# Altium PCB STL.PcbDoc
Units mm, origin at the board's own origin, x right, y up, seen from the top; angles counter-clockwise.
Board outline 100 x 80 mm, 2 copper layers (Top Layer, Bottom Layer); 52 components, 57 nets, 196 pads, 7 vias.
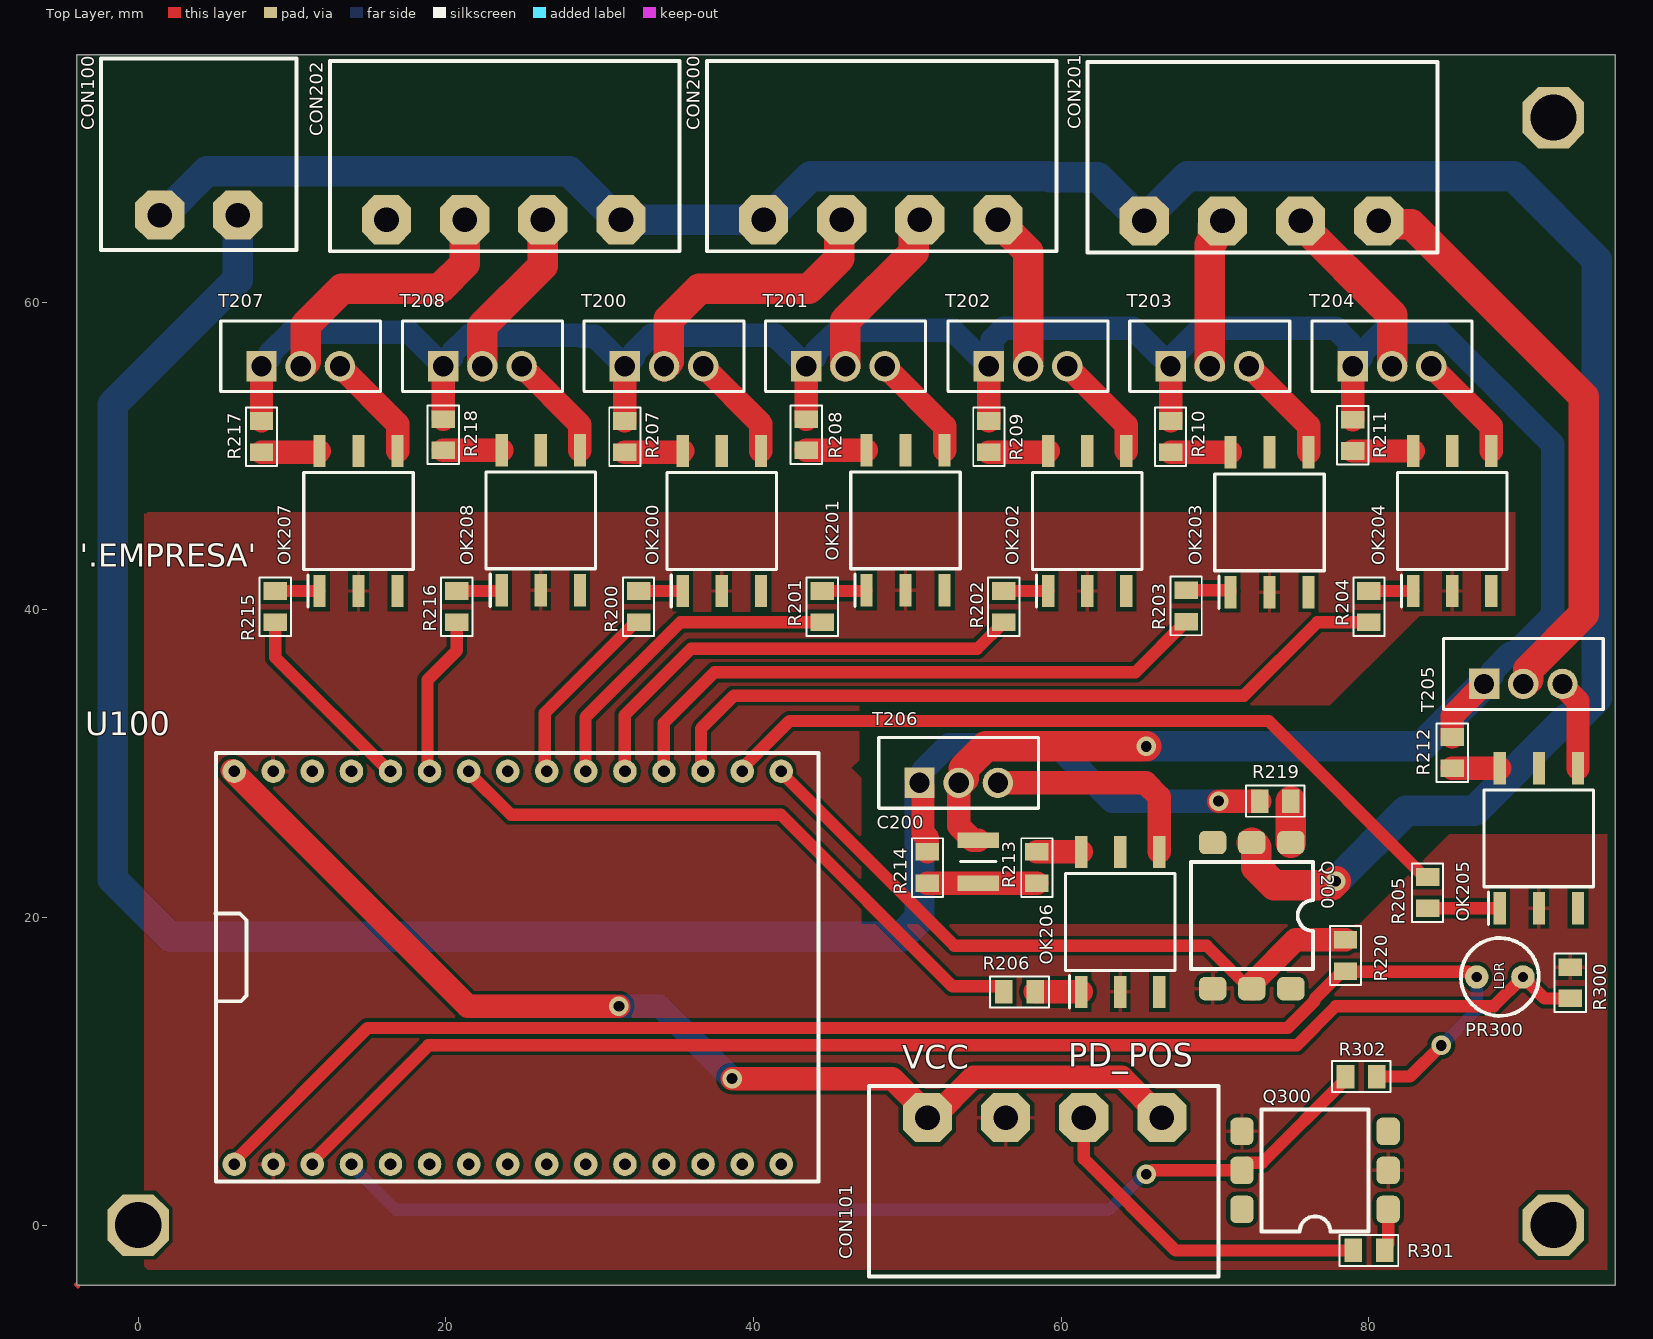
[diagram p0: Top Layer view]
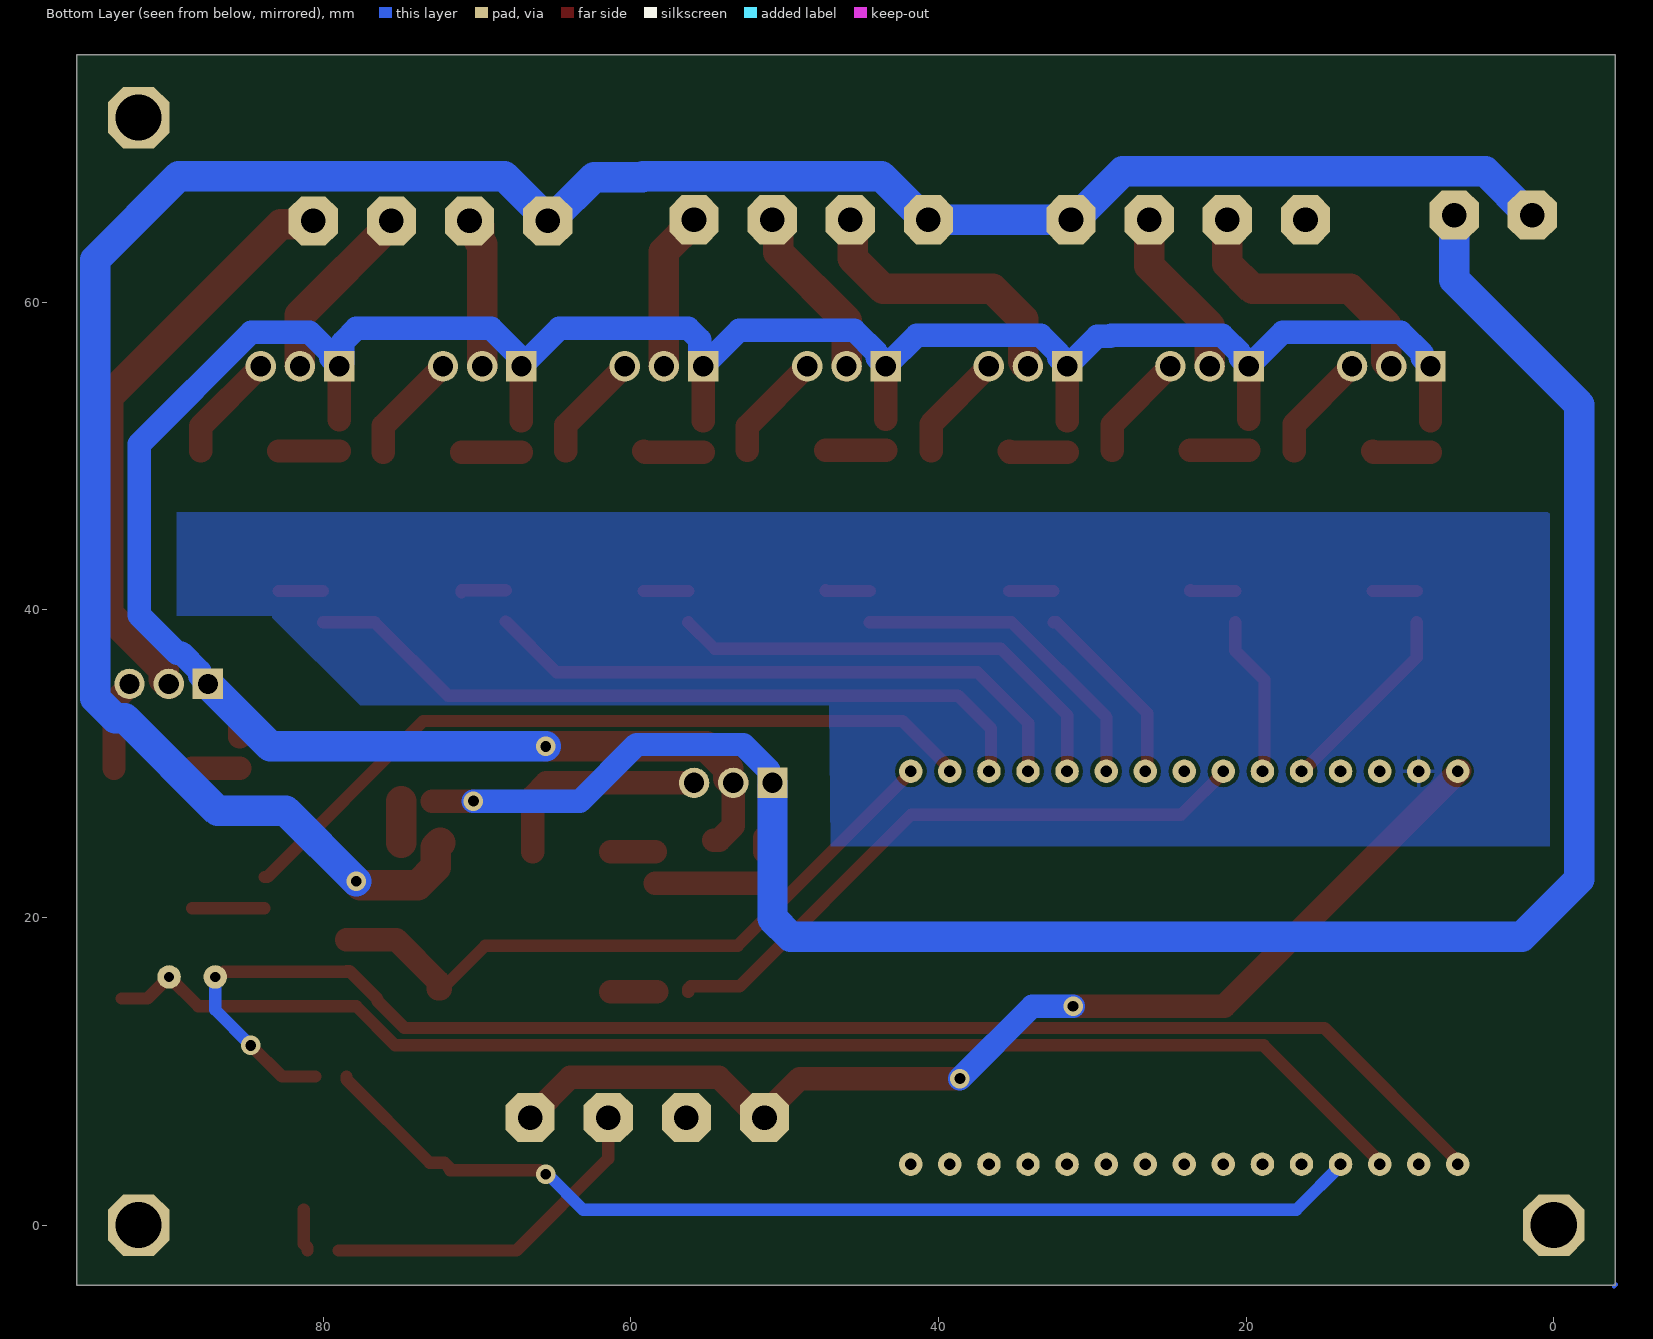
[diagram p1: Bottom Layer view, seen from below]
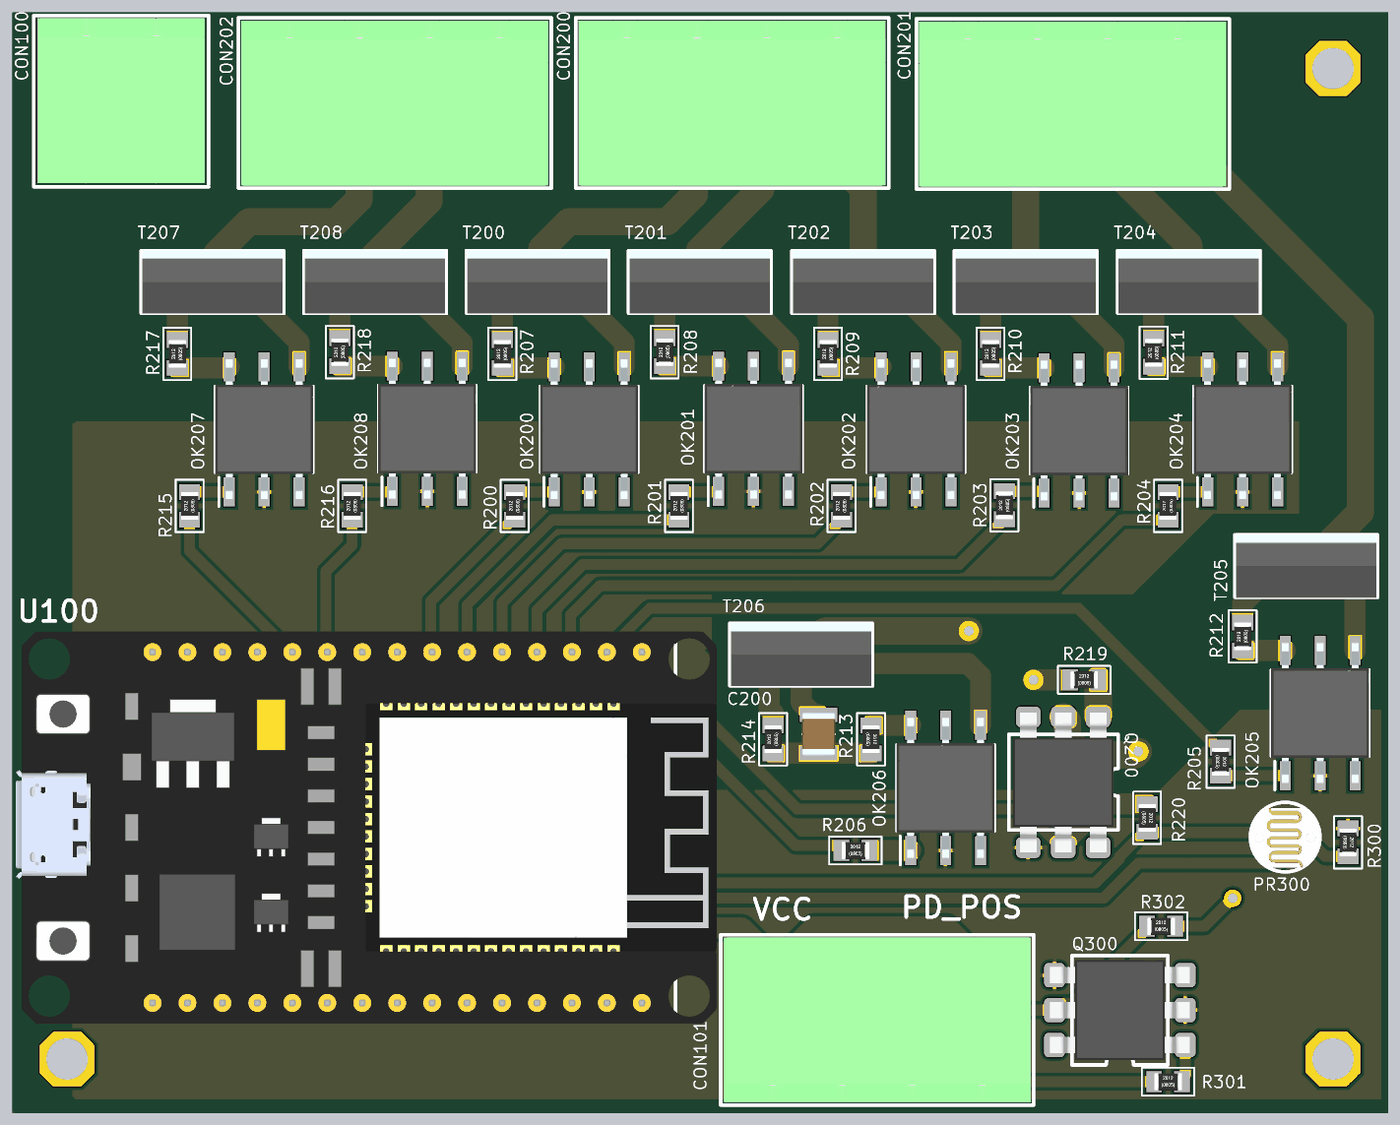
[diagram p2: 3D render of the assembled board from above, using the file's embedded part models]

## Layer stack, top to bottom
Top Solder: solder mask 0.0102, Solder Resist, Dk 3.5
Top Layer: signal copper 0.0356
Dielectric 1: dielectric 0.32, FR-4, Dk 4.8
Bottom Layer: signal copper 0.0356
Bottom Solder: solder mask 0.0102, Solder Resist, Dk 3.5

## Board outline
-3.988,-3.927 -3.988,76.073 96.012,76.073 96.012,-3.927

## Design rules (kind name [scope] priority, off if disabled: settings)
Clearance [All] p1: gap=0.254 ignorepadtopadclearanceinfootprint=FALSE except(0: Arc-Hole Track-Hole SMDPad-Hole THPad-Hole Via-Hole Fill-Hole Poly-Hole Region-Hole Text-Hole)
HoleSize [All] p1: absolutevalues=TRUE maxlimit=4 minlimit=0.025 maxpercent=80.000 minpercent=20.000
HoleToHoleClearance [All] p1: gap=0.1 allowstackedmicrovias=TRUE
PolygonConnect [All] p1: connectstyle=Relief reliefconductorwidth=0.254 reliefentries=4 polygonreliefangle="90 Angle" airgapwidth=0.254
RoutingCorners RoutingCornersAC [InNetClass('ACNET')] p1: cornerstyle=Round minsetback=2.54 maxsetback=2.54
RoutingCorners [All] p2: cornerstyle=45-Degree minsetback=2.54 maxsetback=2.54
RoutingVias [All] p1: holewidth=0.711 width=1.27 viastyle="Through Hole" minholewidth=0.711 minwidth=1.27 maxholewidth=0.711 maxwidth=1.27
SilkToSilkClearance [All] p1: silktosilkclearance=0.127
SilkToSolderMaskClearance [IsPad] p1: minsilkscreentomaskgap=0.127 clearancetoexposedcopper=TRUE
SolderMaskExpansion [All] p1: expansion=0.102 istentingtop=FALSE
Width Width_1 [All] p1: maxlimit=1.98 minlimit=0.8 preferedwidth=1.524
Width Width_AC [InNetClass('ACNET')] p2: maxlimit=3.2 minlimit=0.635 preferedwidth=1.9
25 further rules are at their usual default settings.

## Classes and differential pairs
component class U_Sensors: PR300 Q300 R300 R301 R302
net class ACNET: AC_F AC_N AC_OUT AM1 AM2 VD1 VD2 VDPED VM1 VM2 VMPED
component class U_Control: C200 CON200 CON201 CON202 OK200 OK201 OK202 OK203 OK204 OK205 OK206 OK207 OK208 Q200 R200 R201 R202 R203 R204 R205 R206 R207 R208 R209 R210 R211 R212 R213 R214 R215 R216 R217 R218 R219 R220 T200 T201 T202 T203 T204 T205 T206 T207 T208
component class Processamento: CON100 CON101 U100

## Components (designator, comment, footprint, x,y, rotation, side; value= is the part's Value field where it differs from the comment)
C200 "100nF 500V" CAPC3225-1210N 54.61,23.622 r270 top
CON100 "TERM BLOCK 2POS" "MSTBA 2G" 6.528,65.557 r180 top
CON101 "TERM BLOCK 4POS" "MSTBA 4G" 51.308,6.985 r0 top
CON200 "TERM BLOCK 4POS" "MSTBA 4G" 55.892,65.351 r180 top
CON201 "TERM BLOCK 4POS" "MSTBA 4G" 80.645,65.278 r180 top
CON202 "TERM BLOCK 4POS" "MSTBA 4G" 31.381,65.351 r180 top
OK200 "MOC3021SM" SOP254P1016X450-6N 37.943,45.772 r90 top
OK201 "MOC3021SM" SOP254P1016X450-6N 49.881,45.815 r90 top
OK202 "MOC3021SM" SOP254P1016X450-6N 61.692,45.772 r90 top
OK203 "MOC3021SM" SOP254P1016X450-6N 73.543,45.689 r90 top
OK204 "MOC3021SM" SOP254P1016X450-6N 85.429,45.772 r90 top
OK205 "MOC3021SM" SOP254P1016X450-6N 91.059,25.146 r90 top
OK206 "MOC3021SM" SOP254P1016X450-6N 63.839,19.707 r90 top
OK207 "MOC3021SM" SOP254P1016X450-6N 14.321,45.772 r90 top
OK208 "MOC3021SM" SOP254P1016X450-6N 26.174,45.815 r90 top
PR300 "LDR" "LDR 3x0.5" 88.519,16.129 r90 top
Q200 "4N25" 6-SMD 74.93,24.867 r270 top
Q300 "4N25" 6-SMD 81.255,1.016 r180 top
R200 "1K" CR2012-0805 32.524,40.205 r90 top
R201 "1K" CR2012-0805 44.462,40.205 r90 top
R202 "1K" CR2012-0805 56.273,40.205 r90 top
R203 "1K" CR2012-0805 68.124,40.249 r90 top
R204 "1K" CR2012-0805 80.01,40.205 r90 top
R205 "1K" CR2012-0805 83.82,21.612 r270 top
R206 "1K" CR2012-0805 57.289,15.157 r0 top
R207 "180R" CR2012-0805 31.635,51.254 r90 top
R208 "180R" CR2012-0805 43.426,51.381 r90 top
R209 "180R" CR2012-0805 55.3,51.254 r90 top
R210 "180R" CR2012-0805 67.111,51.254 r90 top
R211 "180R" CR2012-0805 78.962,51.338 r90 top
R212 "180R" CR2012-0805 85.429,30.712 r90 top
R213 "180R" CR2012-0805 58.42,23.241 r270 top
R214 "2K2" CR2012-0805 51.308,23.241 r90 top
R215 "1K" CR2012-0805 8.902,40.205 r90 top
R216 "1K" CR2012-0805 20.713,40.205 r90 top
R217 "180R" CR2012-0805 8.013,51.254 r90 top
R218 "180R" CR2012-0805 19.824,51.381 r90 top
R219 "33K" CR2012-0805 73.914,27.559 r0 top
R220 "10K" CR2012-0805 78.486,17.526 r270 top
R300 "220R" CR2012-0805 93.091,15.748 r270 top
R301 "1K" CR2012-0805 80.01,-1.651 r0 top
R302 "2K2" CR2012-0805 79.502,9.652 r0 top
T200 "BTA12-600BRG" TO255P460X1020X2005-3P 31.635,55.826 r0 top
T201 "BTA12-600BRG" TO255P460X1020X2005-3P 43.427,55.826 r0 top
T202 "BTA12-600BRG" TO255P460X1020X2005-3P 55.3,55.826 r0 top
T203 "BTA12-600BRG" TO255P460X1020X2005-3P 67.111,55.826 r0 top
T204 "BTA12-600BRG" TO255P460X1020X2005-3P 78.962,55.826 r0 top
T205 "BTA12-600BRG" TO255P460X1020X2005-3P 87.493,35.179 r0 top
T206 "BTA12-600BRG" TO255P460X1020X2005-3P 50.79,28.745 r0 top
T207 "BTA12-600BRG" TO255P460X1020X2005-3P 8.013,55.826 r0 top
T208 "BTA12-600BRG" TO255P460X1020X2005-3P 19.824,55.826 r0 top
U100 "MÓDULO ESP32" "ESP32 MOD" 6.24,29.5 r0 top

## Footprints (in the part's own frame and the unit in brackets; to place one, negate y for a bottom-side part, rotate by r counter-clockwise, add the part's x,y. Pads: shape width x height; smd on the part's side, far side on the other; paste and mask are expansions set on the pad)
6-SMD [mm]
  rrect50% 1.52x1.78 smd: 1(0,0) 2(0,-2.54) 3(0,-5.08) 4(9.5,-5.08) 5(9.5,-2.54) 6(9.5,0)
  silkscreen extent 1.27,-6.5 8.23,1.45, body extent -0.33,-6.18 9.83,1.1, height 3.61
CAPC3225-1210N [mm]
  rect 1.02x2.72 smd: 1(-1.4,0) 2(1.4,0)
  silkscreen extent 0,-1.15 0,1.15, body extent -1.6,-1.25 1.6,1.25, height 2.1
CR2012-0805 [mil] "Chip Capacitor"
  rect 45x60 smd: 1(-40,0) 2(40,0)
  silkscreen extent -75,-40 75,40, body extent -39,-25 39,25, height 18
"ESP32 MOD" [mil]
  round 60 hole 30: 1(0,-1005.51) 2(100,-1005.51) 3(100,0) 4(0,0) 5(1300,0) 8(1200,0) 9(1400,0) 10(1100,0) 11(1000,0) 12(900,0) 13(800,0) 14(700,0) 15(600,0) 16(500,0) 17(400,0) 18(300,0) 20(200,0) 21(200,-1005.51) 22(300,-1005.51) 24(400,-1005.51) 25(500,-1005.51) 27(600,-1005.51) 34(700,-1005.51) 35(800,-1005.51) 36(1400,-1005.51) 38(900,-1005.51) 39(1300,-1005.51) 40(1100,-1005.51) 41(1200,-1005.51) 42(1000,-1005.51)
  silkscreen extent -48,-1050 1495,47, body extent -392,-1060 1613,62, height 339
"LDR 3x0.5" [mm]
  round 1.524 hole 0.66: 1(0,-1.5) 2(0,1.5)
  silkscreen extent -2.53,-2.53 2.53,2.53, body extent -2.2,-2.55 2.1,2.55, height 9.1
"MSTBA 2G" [mil]
  oct 126x126 hole 63: 1(2,-4) 2(202,-4)
  silkscreen extent -148,-405 352,85, body extent -137,-398 341,75, height 339
"MSTBA 4G" [mil]
  oct 126x126 hole 63: 1(0,0) 2(200,0) 3(400,0) 4(600,0)
  silkscreen extent -150,-407 745,81, body extent -141,-399 738,73, height 339
SOP254P1016X450-6N [mm]
  rect 2.1x0.8 smd: 1(-4.55,2.54) 2(-4.55,0) 3(-4.55,-2.54) 4(4.55,-2.54) 5(4.55,0) 6(4.55,2.54)
  silkscreen extent -5.6,-3.56 3.15,3.56, body extent -5.08,-3.56 5.08,3.56, height 4.5
TO255P460X1020X2005-3P [mm]
  rect 1.98x1.98 hole 1.32: 1(0,0)
  round 1.98 hole 1.32: 2(2.55,0) 3(5.1,0)
  silkscreen extent -2.65,-1.65 7.75,2.95, body extent -2.55,-1.65 7.65,2.95, height 19.3

## Part data
C200: library part "CAP 100nF 500V C1210C106M6PACTU 1210", "CAP CER 0.1UF 500V X7R 1210", Arrow Part Number=C1210C106M6PACTU, Capacitance=100nF, Case Code (Imperial)=1210, Case Code (Metric)=3225, Dielectric=X7R, Dielectric Material=Ceramic, Manufacturer=KEMET, Manufacturer Part Number=C1210C104KCRACTU, Manufacturer_Name=Kemet, Max Operating Temperature=125°C, Min Operating Temperature=-55°C, Mouser Part Number=80-C1210C106M6P, Package Quantity=1, Supplier Part Number 1=C141218, Tolerance=10%, Voltage Rating=500V, Voltage Rating (DC)=1kV, Arrow Price/Stock=https://www.arrow.com/en/products/c1210c106m6pactu/kemet-corporation, Case/Package=1210, Category="Ceramic Capacitors", ComponentLink1Description=https://datasheet.ciiva.com/5409/kem-c1010-x7r-hv-smd-5409158.pdf?src-supplier=Mouser, ComponentLink1URL=https://datasheet.ciiva.com/5409/kem-c1010-x7r-hv-smd-5409158.pdf?src-supplier=Mouser, Contact Plating=Tin,Matte, Datasheet Link=https://api.kemet.com/component-edge/download/datasheet/C1210C106M6PACTU.pdf, Depth=2.5mm, Height=2.1mm, Length=3.2mm, Manufacturer_Part_Number=C1210C106M6PACTU, Mount="Surface Mount", Mouser Price/Stock=https://www.mouser.co.uk/ProductDetail/KEMET/C1210C106M6PACTU?qs=K%2Fj%2Fqf%252B0fqKxjJfAWxNdjg%3D%3D, Packaging="Tape and Reel", Pricing 1="1=0,22980, 10=0,17550, 30=0,16550, 100=0,15550, 500=0,15110, 1000=0,14890, 1=0,22120, 10=0,16900, 30=0,15930, 100=0,14970, 500=0,14540, 1000=0,14330, 1=1,15440, 10=0,88170, 30=0,83110, 100=0,78120, 500=0,75890, 1000=0,74770, 1=1,10970, 10=0,84760, 30=0,79900, 100=0,75100, 500=0,72950, 1000=0,71880, 1=0,14920, 10=0,11400, 30=0,10740, 100=0,10100, 500=0,09810, 1000=0,09670, 1=0,12760, 10=0,09740, 30=0,09180, 100=0,08630, 500=0,08390, 1000=0,08260, 1=1,36580, 10=1,04320, 30=0,98340, 100=0,92430, 500=0,89790, 1000=0,88460, 1=19,30340, 10=14,74390, 30=13,89800, 100=13,06300, 500=12,68950, 1000=12,50270, 1=0,72810, 10=0,55610, 30=0,52420, 100=0,49270, 500=0,47860, 1000=0,47160, 1=13,29180, 10=10,15230, 30=9,56980, 100=8,99480, 500=8,73760, 1000=8,60900, 1=1,52590, 10=1,16550, 30=1,09860, 100=1,03260, 500=1,00310, 1000=0,98830, 1=0,23690, 10=0,18090, 30=0,17050, 100=0,16030, 500=0,15570, 1000=0,15340, 1=0,17570, 10=0,13420, 30=0,12650, 100=0,11890, 500=0,11550, 1000=0,11380 (AUD)", REACH SVHC="No SVHC", RoHS=Yes, RoHS Compliant=Yes, Series=C, Stock 1=12082, Supplier 1=LCSC, Termination=SMD/SMT, Thickness=0.091inch, Width=2.5mm
CON100: library part "TERM BLOCK HEADER 2POS R/A 5.08MM", "TERM BLOCK HDR 2POS R/A 5.08MM", Color=Green, Current - IEC=12A, Current - UL=15A, Manufacturer="Phoenix Contact", Manufacturer Part Number=1757242, Operating Temperature=-, Supplier Part Number 1=277-1106-ND, Voltage - IEC=400V, Voltage - UL=300V, Category="Connectors, Interconnects", ComponentLink1Description=http://media.digikey.com/pdf/Data%20Sheets/Phoenix%20Contact%20PDFs/1757242.pdf, ComponentLink1URL=http://media.digikey.com/pdf/Data%20Sheets/Phoenix%20Contact%20PDFs/1757242.pdf, Contact Mating Finish=Tin, Features=-, Header Orientation="90°, Right Angle", Mounting Type="Through Hole", Number of Levels=1, Number of Positions=2, Packaging=Bulk, Part Status=Active, Pitch="0.200\" (5.08mm)", Plug Wire Entry=-, Positions Per Level=2, Pricing 1="1=0.59, 10=0.563, 50=0.5386, 100=0.5239, 250=0.4896, 500=0.45044, 1000=0.408, 2500=0.3888, 5000=0.3648 (USD)", RoHS="RoHS Compliant", Stock 1=14081, Supplier 1=Digi-Key, Supplier 2=LCSC, Supplier Part Number 2=C505824, Termination Style=Solder, Type="Header, Male Pins, Shrouded (4 Side)", Wire Gauge or Range - AWG=-, Wire Gauge or Range - mm²=-
CON101 CON200 CON201 CON202: library part "TERM BLOCK HEADER 4POS R/A 5.08MM", "TERM BLOCK HDR 4POS R/A 5.08MM", ComponentLink1Description=http://media.digikey.com/pdf/Data%20Sheets/Phoenix%20Contact%20PDFs/1757242.pdf, ComponentLink1URL=http://media.digikey.com/pdf/Data%20Sheets/Phoenix%20Contact%20PDFs/1757242.pdf
OK200 OK201 OK202 OK203 OK204 OK205 OK206 OK207 OK208: library part "OPTOISO Triac MOC3021SM SOP6N", "OPTOCOUPLERS SMD-6 ROHS", Manufacturer="Orient Technology", Manufacturer Part Number=OR-MOC3021S, Manufacturer_Name=Isocom, Supplier Part Number 1=C370899, Arrow Part Number=MOC3021SM, Arrow Price/Stock=https://www.arrow.com/en/products/moc3021sm/isocom, Datasheet Link=https://datasheet.datasheetarchive.com/originals/distributors/Datasheets-313/192003.pdf, Height=4.5mm, Manufacturer_Part_Number=MOC3021SM, Supplier 1=LCSC
PR300: library part "LDR GL5506(4-7K) SMD", "THROUGH HOLE PHOTORESISTORS ROHS", Manufacturer="JCHL(Shenzhen Jing Chuang He Li Tech)", Manufacturer Part Number=GL5506(4-7K), Supplier Part Number 1=C404970, Supplier 1=LCSC
Q200 Q300: library part "OPTOISO 4N25S 2.5KV TRANS W/BASE 6SMD", "OPTOISO 4.17KV TRANS W/BASE 6SMD", Case/Package=SMD/SMT, Manufacturer="ON Semiconductor", Manufacturer Part Number=4N25SR2M, Max Power Dissipation=250mW, Package Quantity=1000, Supplier Part Number 1=4N25SR2MCT-ND, Category=Optocouplers, ComponentLink1Description=http://www.farnell.com/datasheets/2287881.pdf?src-supplier=Farnell, ComponentLink1URL=http://www.farnell.com/datasheets/2287881.pdf?src-supplier=Farnell, ComponentLink2Description=https://produktinfo.conrad.com/datenblaetter/1200000-1299999/001265459-da-01-en-OPTOISOLATOR_TRANS_7__4N25SR2M_SMD_6_ONS.PDF?src-supplier=Conrad, ComponentLink2URL=https://produktinfo.conrad.com/datenblaetter/1200000-1299999/001265459-da-01-en-OPTOISOLATOR_TRANS_7__4N25SR2M_SMD_6_ONS.PDF?src-supplier=Conrad, ComponentLink3Description=http://www.onsemi.com/pub/Collateral/4N37M-D.pdf?src-supplier=Digi-Key, ComponentLink3URL=http://www.onsemi.com/pub/Collateral/4N37M-D.pdf?src-supplier=Digi-Key, ComponentLink4Description=http://www.farnell.com/datasheets/2287881.pdf?src-supplier=Newark, ComponentLink4URL=http://www.farnell.com/datasheets/2287881.pdf?src-supplier=Newark, ComponentLink5Description=https://www.fairchildsemi.com/datasheets/4N/4N25M.pdf?src-supplier=Digi-Key, ComponentLink5URL=https://www.fairchildsemi.com/datasheets/4N/4N25M.pdf?src-supplier=Digi-Key, Lead Free="Lead Free", Power Dissipation=250mW, Pricing 1="1=0,73000, 10=0,57000, 100=0,36570, 500=0,31448 (USD)", RoHS=No, Stock 1=12901, Supplier 1=Digi-Key, Supplier 2=LCSC, Supplier Part Number 2=C143074
R200 R201 R202 R203 R204 R205 R206 R215 R216 R301: library part "RES 1K OHM 1% 1/8W 0805 SMD", "RES SMD 1K OHM 1% 1/8W 0805", Case Code (Imperial)=0805, Case Code (Metric)=2012, Manufacturer=Yageo, Manufacturer Part Number=RC0805FR-071KL, Max Operating Temperature=155°C, Max Power Dissipation=125mW, Min Operating Temperature=-55°C, Package Quantity=1, Resistance=1kR, Supplier Part Number 1=311-1.00KCRDKR-ND, Temperature Coefficient=100ppm/°C, Tolerance=1%, Voltage Rating=150V, Case/Package=0805, Category="Chip SMD Resistors", ComponentLink1Description=http://media.digikey.com/pdf/Data%20Sheets/Rohm%20PDFs/MCR10%20(new)%20series.pdf, ComponentLink1URL=http://media.digikey.com/pdf/Data%20Sheets/Rohm%20PDFs/MCR10%20(new)%20series.pdf, ComponentLink2Description=https://datasheet.ciiva.com/2456/pyu-r-int-thick-7-2456976.pdf?src-supplier=Digi-Key, ComponentLink2URL=https://datasheet.ciiva.com/2456/pyu-r-int-thick-7-2456976.pdf?src-supplier=Digi-Key, ComponentLink3Description=https://datasheet.ciiva.com/2456/pyu-r-int-thick-7-2456977.pdf?src-supplier=Digi-Key, ComponentLink3URL=https://datasheet.ciiva.com/2456/pyu-r-int-thick-7-2456977.pdf?src-supplier=Digi-Key, ComponentLink4Description=https://datasheet.ciiva.com/7941/1686128-7941719.pdf?src-supplier=Element14, ComponentLink4URL=https://datasheet.ciiva.com/7941/1686128-7941719.pdf?src-supplier=Element14, ComponentLink5Description=https://datasheet.ciiva.com/16850/rc0805-16850409.pdf?src-supplier=Future+Electronics, ComponentLink5URL=https://datasheet.ciiva.com/16850/rc0805-16850409.pdf?src-supplier=Future+Electronics, ComponentLink6Description=https://datasheet.ciiva.com/46385/444164-46385020.pdf?src-supplier=Element14, ComponentLink6URL=https://datasheet.ciiva.com/46385/444164-46385020.pdf?src-supplier=Element14, ComponentLink7Description=https://datasheet.ciiva.com/2456/pyu-r-int-thick-7-2456975.pdf?src-supplier=Digi-Key, ComponentLink7URL=https://datasheet.ciiva.com/2456/pyu-r-int-thick-7-2456975.pdf?src-supplier=Digi-Key, Composition="Thick Film", Depth=1.25mm, Features="Moisture Resistant", Height=0.024inch, Lead Free="Lead Free", Length=0.079inch, Military Standard=Not, Number of Pins=2, Number of Terminations=2, Packaging="Tape and Reel", Power Rating=125mW, Pricing 1="1=0,10000, 10=0,04000, 100=0,01630, 1000=0,00731, 2500=0,00635 (USD)", REACH SVHC=Unknown, RoHS=Yes, Stock 1=24108233, Supplier 1=Digi-Key, Supplier 2=LCSC, Supplier Part Number 2=C17513, Termination=SMD/SMT, Voltage Rating (DC)=150V, Width=0.049inch
R207 R208 R209 R210 R211 R212 R213 R217 R218: library part "RES 180R 1/8W 5% 0805 SMD", "RES 180 OHM 1/8W 5% 0805 SMD", Manufacturer=Uniroyal, Manufacturer Part Number=0805W8J0181T5E, Operating Temperature="-55°C ~ 155°C", Package / Case="0805 (2012 Metric)", Power (Watts)="0.125W, 1/8W", Resistance (Ohms)=180, Supplier Device Package=0805, Supplier Part Number 1=P180ACT-ND, Temperature Coefficient=±200ppm/°C, Tolerance=±5%, Category=Resistors, ComponentLink1Description=http://industrial.panasonic.com/www-cgi/jvcr13pz.cgi?E+PZ+3+AOA0001+ERJ6GEYJ181V+7+WW, ComponentLink1URL=http://industrial.panasonic.com/www-cgi/jvcr13pz.cgi?E+PZ+3+AOA0001+ERJ6GEYJ181V+7+WW, Composition="Thick Film", Failure Rate=-, Features="Automotive AEC-Q200", Height - Seated (Max)="0.028\" (0.70mm)", Packaging="Cut Tape (CT)", Part Status=Active, Pricing 1="1=0.1, 10=0.025, 25=0.018, 50=0.0136, 100=0.01, 250=0.00764, 500=0.00612, 1000=0.00451 (USD)", RoHS="RoHS Compliant", Size / Dimension="0.079\" L x 0.049\" W (2.00mm x 1.25mm)", Stock 1=114196, Supplier 1=Digi-Key, Supplier 2=LCSC, Supplier Part Number 2=C1339
R214 R302: library part "RES 2K2 OHM 1/8W 5% 0805 SMD", "RES SMD 2.2K OHM 5% 1/8W 0805", Manufacturer="Panasonic Electronic Components", Manufacturer Part Number=ERJ-6GEYJ222V, Operating Temperature="-55°C ~ 155°C", Package / Case="0805 (2012 Metric)", Power (Watts)="0.125W, 1/8W", Resistance (Ohms)=2.2k, Supplier Device Package=0805, Supplier Part Number 1=P2.2KACT-ND, Temperature Coefficient=±200ppm/°C, Tolerance=±5%, Category=Resistors, ComponentLink1Description=http://industrial.panasonic.com/www-cgi/jvcr13pz.cgi?E+PZ+3+AOA0001+ERJ6GEYJ222V+7+WW, ComponentLink1URL=http://industrial.panasonic.com/www-cgi/jvcr13pz.cgi?E+PZ+3+AOA0001+ERJ6GEYJ222V+7+WW, Composition="Thick Film", Datasheet=http://industrial.panasonic.com/www-cgi/jvcr13pz.cgi?E+PZ+3+AOA0001+ERJ6GEYJ222V+7+WW, eVendor=Digi-Key, eVendor#=P2.2KACT-ND, eVendorPrice=0,10, Failure Rate=-, Features="Automotive AEC-Q200", Height - Seated (Max)="0.028\" (0.70mm)", MOQ=2500, MSRP=0,00459, Number of Terminations=2, Obs=ERJ-6GEYJ222V, Packaging="Cut Tape (CT)", Part Status=Active, Part#=ERJ-6GEYJ222V, Pricing 1="1=0.1, 10=0.025, 25=0.018, 50=0.0136, 100=0.01, 250=0.00764, 500=0.00612, 1000=0.00451 (USD)", RoHS="RoHS Compliant", Size / Dimension="0.079\" L x 0.049\" W (2.00mm x 1.25mm)", Stock 1=100522, Supplier 1=Digi-Key, Supplier 2=LCSC, Supplier Part Number 2=C17520
R219: library part "RES 33K OHM 5% 1/8W 0805 SMD", "RES SMD 33K OHM 5% 1/8W 0805", Manufacturer=Uniroyal, Manufacturer Part Number=0805W8J0333T5E, Operating Temperature="-55°C ~ 155°C", Package / Case="0805 (2012 Metric)", Power (Watts)="0.125W, 1/8W", Resistance (Ohms)=33k, Supplier Device Package=0805, Supplier Part Number 1=RHM33KCPCT-ND, Temperature Coefficient=±200ppm/°C, Tolerance=±5%, Category=Resistors, ComponentLink1Description=http://rohmfs.rohm.com/en/products/databook/datasheet/passive/resistor/chip_resistor/mcr_g.pdf, ComponentLink1URL=http://rohmfs.rohm.com/en/products/databook/datasheet/passive/resistor/chip_resistor/mcr_g.pdf, Composition="Thick Film", Failure Rate=-, Features=-, Height - Seated (Max)="0.026\" (0.65mm)", Packaging="Cut Tape (CT)", Part Status=Active, Pricing 1="1=0.1, 10=0.015, 25=0.0112, 50=0.0084, 100=0.0063, 250=0.00476, 500=0.00382, 1000=0.00281 (USD)", RoHS="RoHS Compliant", Size / Dimension="0.079\" L x 0.049\" W (2.00mm x 1.25mm)", Stock 1=8707, Supplier 1=Digi-Key, Supplier 2=LCSC, Supplier Part Number 2=C25630
R220: library part "RES 10K OHM 1% 1/8W 0805 SMD", "RES 0805 10K Ohm 0.1% 1/10W  SMD", Case Code (Imperial)=0805, Case Code (Metric)=2012, Manufacturer="Panasonic Electronic Components", Manufacturer Part Number=ERJ-6ENF1002V, Max Operating Temperature=155°C, Max Power Dissipation=125mW, Min Operating Temperature=-55°C, Number of Resistors=1, Operating Temperature="-55°C ~ 155°C", Package / Case="0805 (2012 Metric)", Package Quantity=5000, Power (Watts)="0.125W, 1/8W", Power Rating=100mW, Resistance=10kR, Resistance (Ohms)=10k, Resistance Tolerance=0.1%, Resistor Type="Thin Film", Supplier Part Number 1=A105823-ND, Temperature Coefficient=±100ppm/°C, Tolerance=±1%, Voltage Rating=150V, Case/Package=0805, Category=Resistors, ComponentLink1Description=https://industrial.panasonic.com/cdbs/www-data/pdf/RDA0000/AOA0000C283.pdf, ComponentLink1URL=https://industrial.panasonic.com/cdbs/www-data/pdf/RDA0000/AOA0000C283.pdf, ComponentLink2Description=https://datasheet.ciiva.com/11808/0900766b80f80784-11808080.pdf?src-supplier=RSComponents, ComponentLink2URL=https://datasheet.ciiva.com/11808/0900766b80f80784-11808080.pdf?src-supplier=RSComponents, ComponentLink3Description=https://datasheet.ciiva.com/16514/aoa0000ce2-16514021.pdf?src-supplier=Avnet+Asia, ComponentLink3URL=https://datasheet.ciiva.com/16514/aoa0000ce2-16514021.pdf?src-supplier=Avnet+Asia, ComponentLink4Description=https://datasheet.ciiva.com/27055/1988971-27055733.pdf?src-supplier=Jameco, ComponentLink4URL=https://datasheet.ciiva.com/27055/1988971-27055733.pdf?src-supplier=Jameco, ComponentLink5Description=https://datasheet.ciiva.com/16759/70260748-16759350.pdf?src-supplier=Allied+Electronics, ComponentLink5URL=https://datasheet.ciiva.com/16759/70260748-16759350.pdf?src-supplier=Allied+Electronics, ComponentLink6Description=https://datasheet.ciiva.com/16725/70260748-16725031.pdf?src-supplier=Allied+Electronics, ComponentLink6URL=https://datasheet.ciiva.com/16725/70260748-16725031.pdf?src-supplier=Allied+Electronics, ComponentLink7Description=https://datasheet.ciiva.com/46372/1678782-46372714.pdf?src-supplier=Element14, ComponentLink7URL=https://datasheet.ciiva.com/46372/1678782-46372714.pdf?src-supplier=Element14, ComponentLink8Description=https://datasheet.ciiva.com/46372/1678782-46372715.pdf?src-supplier=Element14, ComponentLink8URL=https://datasheet.ciiva.com/46372/1678782-46372715.pdf?src-supplier=Element14, ComponentLink9Description=https://datasheet.ciiva.com/7830/426256-7830745.pdf?src-supplier=Element14, ComponentLink9URL=https://datasheet.ciiva.com/7830/426256-7830745.pdf?src-supplier=Element14, ComponentLink10Description=https://datasheet.ciiva.com/17212/aoa0000ce2-17212108.pdf?src-supplier=Avnet+Europe, ComponentLink10URL=https://datasheet.ciiva.com/17212/aoa0000ce2-17212108.pdf?src-supplier=Avnet+Europe, ComponentLink11Description=https://datasheet.ciiva.com/30140/aoa0000ce2-30140236.pdf?src-supplier=Onlinecomponents.com, ComponentLink11URL=https://datasheet.ciiva.com/30140/aoa0000ce2-30140236.pdf?src-supplier=Onlinecomponents.com, ComponentLink12Description=https://datasheet.ciiva.com/24070/aoa0000ce2-24070702.pdf?src-supplier=Mouser, ComponentLink12URL=https://datasheet.ciiva.com/24070/aoa0000ce2-24070702.pdf?src-supplier=Mouser, ComponentLink13Description=https://datasheet.ciiva.com/16723/70063741-16723029.pdf?src-supplier=Allied+Electronics, ComponentLink13URL=https://datasheet.ciiva.com/16723/70063741-16723029.pdf?src-supplier=Allied+Electronics, ComponentLink14Description=https://datasheet.ciiva.com/24440/eng-ds-1773270-l-24440188.pdf?src-supplier=Onlinecomponents.com, ComponentLink14URL=https://datasheet.ciiva.com/24440/eng-ds-1773270-l-24440188.pdf?src-supplier=Onlinecomponents.com, ComponentLink15Description=https://datasheet.ciiva.com/7731/eng-ds-1773270-l-7731311.pdf?src-supplier=Element14, ComponentLink15URL=https://datasheet.ciiva.com/7731/eng-ds-1773270-l-7731311.pdf?src-supplier=Element14, ComponentLink16Description=https://datasheet.ciiva.com/14181/jcrn73-data-e-14181423.pdf?src-supplier=Distrelec, ComponentLink16URL=https://datasheet.ciiva.com/14181/jcrn73-data-e-14181423.pdf?src-supplier=Distrelec, Composition="Thick Film", Contact Plating=Tin, Depth=1.25mm, ELV=Compliant, Failure Rate=-, Features="Automotive AEC-Q200", Height=0.6mm, Height - Seated (Max)="0.028\" (0.70mm)", Lead Free="Lead Free", Length=2mm, Military Standard=Not, Mount="Surface Mount", Number of Pins=2, Number of Terminations=2, Packaging="Cut Tape (CT)", Part Status=Active, Pricing 1="1=0.1, 10=0.036, 25=0.0264, 50=0.02, 100=0.0148, 250=0.01124, 500=0.009, 1000=0.00663 (USD)", Pricing 2="1=1,68000, 10=1,48900, 100=1,13720, 1000=0,73645 (USD)", Radiation Hardening=No, REACH SVHC="No SVHC", RoHS="RoHS Compliant", Size / Dimension="0.079\" L x 0.049\" W (2.00mm x 1.25mm)", Stock 1=2392770, Stock 2=1650, Supplier 1=Digi-Key, Supplier 2=Digi-Key, Supplier 3=LCSC, Supplier Device Package=0805, Supplier Part Number 2=P10KACT-ND, Supplier Part Number 3=C17414, Termination=SMD/SMT, Voltage Rating (DC)=150V, Width=0.049inch, Working Voltage=150V
R300: library part "RES 220R OHM 5% 1/8W 0805 SMD", "RES SMD 220 OHM 5% 1/8W 0805", Manufacturer="Panasonic Electronic Components", Manufacturer Part Number=ERJ-6GEYJ221V, Operating Temperature="-55°C ~ 155°C", Package / Case="0805 (2012 Metric)", Power (Watts)="0.125W, 1/8W", Resistance (Ohms)=220, Supplier Device Package=0805, Supplier Part Number 1=P220ACT-ND, Temperature Coefficient=±200ppm/°C, Tolerance=±5%, Category=Resistors, ComponentLink1Description=http://industrial.panasonic.com/www-cgi/jvcr13pz.cgi?E+PZ+3+AOA0001+ERJ6GEYJ221V+7+WW, ComponentLink1URL=http://industrial.panasonic.com/www-cgi/jvcr13pz.cgi?E+PZ+3+AOA0001+ERJ6GEYJ221V+7+WW, Composition="Thick Film", Failure Rate=-, Features="Automotive AEC-Q200", Height - Seated (Max)="0.028\" (0.70mm)", Packaging="Cut Tape (CT)", Part Status=Active, Pricing 1="1=0.1, 10=0.025, 25=0.018, 50=0.0136, 100=0.01, 250=0.00764, 500=0.00612, 1000=0.00451 (USD)", RoHS="RoHS Compliant", Size / Dimension="0.079\" L x 0.049\" W (2.00mm x 1.25mm)", Stock 1=118007, Supplier 1=Digi-Key
T200 T201 T202 T203 T204 T205 T206 T207 T208: library part "THIRISTOR  TRIAC BTA12-600BRG TO220", "Thyristor TRIAC 600V 126A 3-Pin(3+Tab) TO-220AB Insulated Tube", Case/Package=TO-220AB, Current Rating=12A, Hold Current=50mA, Manufacturer=STMicroelectronics, Max Operating Temperature=125°C, Max Repetitive Reverse Voltage (Vrrm)=600V, Min Operating Temperature=-40°C, Mouser Part Number=511-BTA12-600B, Package Quantity=50, Supplier Part Number 1=C10063, Arrow Part Number=BTA12-600BRG, Arrow Price/Stock=https://www.arrow.com/en/products/bta12-600brg/stmicroelectronics, Category=TRIACs, ComponentLink1Description=https://datasheet.ciiva.com/14164/bta12-eng-tds-14164177.pdf?src-supplier=Distrelec, ComponentLink1URL=https://datasheet.ciiva.com/14164/bta12-eng-tds-14164177.pdf?src-supplier=Distrelec, ComponentLink2Description=https://datasheet.ciiva.com/15140/getdatasheetpartid-146661-15140538.pdf?src-supplier=Verical, ComponentLink2URL=https://datasheet.ciiva.com/15140/getdatasheetpartid-146661-15140538.pdf?src-supplier=Verical, ComponentLink3Description=https://datasheet.ciiva.com/3053/cd00002267-3053549.pdf?src-supplier=Avnet, ComponentLink3URL=https://datasheet.ciiva.com/3053/cd00002267-3053549.pdf?src-supplier=Avnet, ComponentLink4Description=https://datasheet.ciiva.com/4749/cd00002267-4749019.pdf?src-supplier=Mouser, ComponentLink4URL=https://datasheet.ciiva.com/4749/cd00002267-4749019.pdf?src-supplier=Mouser, ComponentLink5Description=https://datasheet.ciiva.com/1197/1717978-1197123.pdf?src-supplier=Element14, ComponentLink5URL=https://datasheet.ciiva.com/1197/1717978-1197123.pdf?src-supplier=Element14, ComponentLink6Description=https://datasheet.ciiva.com/25889/cd00002267-25889495.pdf?src-supplier=Avnet+Europe, ComponentLink6URL=https://datasheet.ciiva.com/25889/cd00002267-25889495.pdf?src-supplier=Avnet+Europe, Contact Plating=Tin,Matte, Datasheet Link=http://www.st.com/web/en/resource/technical/document/datasheet/CD00002267.pdf, Element Configuration=Single, Height=4.6mm, Lead Free="Lead Free", Length=10.4mm, Manufacturer Part Number=BTA12-600BRG, Manufacturer_Name=STMicroelectronics, Manufacturer_Part_Number=BTA12-600BRG, Mount="Through Hole", Mouser Price/Stock=https://www.mouser.co.uk/ProductDetail/STMicroelectronics/BTA12-600BRG/?qs=giOUUUQrSzKZwChWaBwGpA%3D%3D, Number of Pins=3, Packaging=Rail/Tube, Pricing 1="1=0,84210, 10=0,62980, 30=0,59210, 100=0,55430, 500=0,53550, 1000=0,52840, 1=0,81060, 10=0,60630, 30=0,57000, 100=0,53360, 500=0,51550, 1000=0,50870, 1=4,23000, 10=3,16360, 30=2,97440, 100=2,78450, 500=2,68990, 1000=2,65440, 1=4,06630, 10=3,04120, 30=2,85930, 100=2,67680, 500=2,58580, 1000=2,55170, 1=0,54680, 10=0,40900, 30=0,38450, 100=0,36000, 500=0,34770, 1000=0,34310, 1=0,46740, 10=0,34960, 30=0,32870, 100=0,30770, 500=0,29720, 1000=0,29330, 1=5,00460, 10=3,74300, 30=3,51910, 100=3,29450, 500=3,18250, 1000=3,14050, 1=70,73140, 10=52,90020, 30=49,73610, 100=46,56100, 500=44,97890, 1000=44,38570, 1=2,66790, 10=1,99530, 30=1,87600, 100=1,75620, 500=1,69650, 1000=1,67420, 1=48,70380, 10=36,42570, 30=34,24700, 100=32,06070, 500=30,97130, 1000=30,56280, 1=5,59110, 10=4,18160, 30=3,93150, 100=3,68050, 500=3,55550, 1000=3,50860, 1=0,86790, 10=0,64910, 30=0,61030, 100=0,57130, 500=0,55190, 1000=0,54460, 1=0,64380, 10=0,48150, 30=0,45270, 100=0,42380, 500=0,40940, 1000=0,40400 (AUD)", Radiation Hardening=No, REACH SVHC="No SVHC", RMS Current (Irms)=12A, RoHS=Yes, RoHS Compliant=Yes, Series=BTA12, Stock 1=4527, Supplier 1=LCSC, Voltage Rating (DC)=600V, Weight=0.211644oz, Width=4.6mm
U100: library part "IC MICOCONTROLADOR ESP32 MODULO"

## Free pads (board coordinates)
  oct 4x4 hole 3: 71(0,0) 71(92,0) 71(92,72)

## Via types
v1: diameter 1.27, hole 0.711, Top Layer to Bottom Layer, 7 vias

## Nets (pads, with @x,y where several pads share a name; then routed paths per layer and width w, separated by ;. In a path a pad name is that pad's centre, name@x,y a point inside that pad or via, vN(x,y) a via of type N, cw(c..) or ccw(c..) an arc to the next point about the centre after c; other vN are vias at no path point)
AC_F: CON100.1 R214.2 R219.1 T206.1 | length 139.6
  Top Layer w1.524: T206.1 51.018,28.517 51.018,25.469 51.308,25.179 R214.2 ; v1(70.231,27.559) R219.1
  Bottom Layer w1.524: T206.1 51.018,28.973 51.018,29.555 52.705,31.242 59.626,31.242 63.309,27.559 v1(70.231,27.559)
  Bottom Layer w1.98: CON100.1 6.477,61.468 -1.651,53.34 -1.651,22.479 2.084,18.744 49.605,18.744 50.79,19.929 T206.1
AC_N: CON100.2 CON200.4 CON201.4 CON202.1 Q200.2 | length 159.6
  Top Layer w1.98: Q200.2 72.696,24.561 72.696,23.258 73.856,22.098 77.597,22.098 v1(77.851,22.352)
  Bottom Layer w1.98: CON100.2 1.617,65.659 4.461,68.503 28.01,68.503 31.161,65.351 CON202.1 CON200.4 40.873,65.351 43.717,68.196 59.185,68.196 59.251,68.13 62.385,68.13 65.163,65.351 65.384,65.351 68.228,68.196 89.391,68.196 94.827,62.76 94.827,34.254 93.518,32.945 92.889,32.945 86.868,26.924 82.423,26.924 v1(77.851,22.352)
AC_OUT: C200.1 R207.2 R208.2 R209.2 R210.2 R211.2 R212.2 R217.2 R218.2 T200.1 T201.1 T202.1 T203.1 T204.1 T205.1 T206.2 T207.1 T208.1 | length 190.1
  Top Layer w1.524: R217.2 T207.1 ; R218.2 T208.1 ; R207.2 T200.1 ; R208.2 T201.1 ; T206.2 53.34,25.946 54.264,25.022 C200.1 ; R209.2 T202.1 ; R210.2 T203.1 ; R211.2 T204.1 ; R212.2 85.429,33.115 T205.1
  Top Layer w1.98: T206.2 53.656,29.061 53.656,29.671 55.1,31.115 v1(65.532,31.115)
  Bottom Layer w1.524: T207.1 8.558,56.371 8.558,56.657 9.939,58.039 17.612,58.039 T208.1 20.369,56.371 20.369,56.657 21.544,57.833 28.781,57.833 28.829,57.785 29.677,57.785 T200.1 32.18,56.371 32.18,56.657 33.355,57.833 41.42,57.833 T201.1 43.97,56.371 43.97,56.657 45.479,58.166 52.961,58.166 T202.1 55.528,56.055 55.528,57.56 56.261,58.293 64.645,58.293 T203.1 67.339,56.055 67.339,56.544 69.088,58.293 77.841,58.293 78.734,57.4 78.734,56.055 T204.1 79.506,56.371 79.506,56.657 80.891,58.043 84.682,58.043 91.948,50.777 91.948,39.634 89.499,37.185 89.212,37.185 88.037,36.01 88.037,35.723 T205.1 ; T206.2 T206.2@53.34,28.869
  Bottom Layer w1.98: v1(65.532,31.115) 83.429,31.115 T205.1
AM1: CON200.2 T201.2 | length 11.5
  Top Layer w1.98: T201.2 45.976,58.803 50.422,63.249 50.422,64.961 CON200.2
AM2: CON201.2 T204.2 | length 12.1
  Top Layer w1.98: CON201.2@75.323,65.351 81.512,59.163 T204.2
DIMMER1: R206.1 U100.15 | length 41
  Top Layer w0.8: U100.15@21.348,29.551 24.229,26.67 41.783,26.67 52.934,15.519 56.102,15.519 56.273,15.347 R206.1
FOC1: R215.1 U100.17 | length 12.7
  Top Layer w0.8: R215.1 8.902,36.917 U100.17@16.268,29.551
FOC2: R216.1 U100.16 | length 10.4
  Top Layer w0.8: U100.16@18.808,29.551 18.808,35.445 20.713,37.35 R216.1
FOC3: R200.1 U100.13 | length 12.3
  Top Layer w0.8: U100.13@26.428,29.551 26.428,33.284 32.334,39.189 R200.1
FOC4: R201.1 U100.12 | length 21.5
  Top Layer w0.8: U100.12@28.968,29.551 29.083,29.665 29.083,33.02 35.252,39.189 R201.1
FOC5: R202.1 U100.11 | length 30.8
  Top Layer w0.8: U100.11@31.508,29.551 31.623,29.665 31.623,33.147 35.941,37.465 54.549,37.465 R202.1
FOC6: R203.1 U100.10 | length 39.8
  Top Layer w0.8: U100.10@34.048,29.551 34.163,29.665 34.163,32.639 37.465,35.941 64.832,35.941 R203.1
FOC7: R204.1 U100.8 | length 49
  Top Layer w0.8: U100.8@36.588,29.551 36.588,32.27 38.735,34.417 71.882,34.417 76.654,39.189 R204.1
FOC8: R205.1 U100.5 | length 50.2
  Top Layer w0.8: U100.5@39.128,29.551 42.344,32.766 73.491,32.766 83.63,22.628 R205.1
GND: CON101.2 OK200.2 OK201.2 OK202.2 OK203.2 OK204.2 OK205.2 OK206.2 OK207.2 OK208.2 Q200.4 Q300.2 Q300.4 R300.1 U100.2 U100.3
LIGTH_SENS: PR300.1 R300.2 U100.21 | length 87.5
  Top Layer w0.8: U100.21@11.188,4.01 18.862,11.684 75.311,11.684 77.851,14.224 88.114,14.224 PR300.1 91.416,14.732 R300.2
NetC200_2: C200.2 R213.2 R214.1 | length 7.1
  Top Layer w1.524: R214.1 R213.2
NetOK200_1: OK200.1 R200.2 | length 2.9
  Top Layer w0.8: R200.2 OK200.1
NetOK200_4: OK200.4 T200.3 | length 7.1
  Top Layer w1.524: T200.3 40.483,52.079 OK200.4
NetOK200_6: OK200.6 R207.1 | length 3.8
  Top Layer w1.524: R207.1 35.32,50.238 OK200.6
NetOK201_1: OK201.1 R201.2 | length 2.9
  Top Layer w0.8: R201.2 47.341,41.221 OK201.1
NetOK201_4: OK201.4 T201.3 | length 7.1
  Top Layer w1.524: T201.3 52.421,51.932 OK201.4
NetOK201_6: OK201.6 R208.1 | length 3.9
  Top Layer w1.524: R208.1 OK201.6
NetOK202_1: OK202.1 R202.2 | length 2.9
  Top Layer w0.8: R202.2 OK202.1
NetOK202_4: OK202.4 T202.3 | length 7.1
  Top Layer w1.524: T202.3 64.232,51.994 OK202.4
NetOK202_6: OK202.6 R209.1 | length 3.9
  Top Layer w1.524: R209.1 59.069,50.238 OK202.6
NetOK203_1: OK203.1 R203.2 | length 3
  Top Layer w0.8: R203.2 71.003,41.265 OK203.1
NetOK203_4: OK203.4 T203.3 | length 7.2
  Top Layer w1.524: T203.3 76.083,51.954 OK203.4
NetOK203_6: OK203.6 R210.1 | length 3.9
  Top Layer w1.524: R210.1 OK203.6
NetOK204_1: OK204.1 R204.2 | length 2.9
  Top Layer w0.8: R204.2 OK204.1
NetOK204_4: OK204.4 T204.3 | length 7.1
  Top Layer w1.524: T204.3 87.969,51.92 OK204.4
NetOK204_6: OK204.6 R211.1 | length 3.9
  Top Layer w1.524: R211.1 OK204.6
NetOK205_1: OK205.1 R205.2 | length 4.7
  Top Layer w0.8: R205.2 OK205.1
NetOK205_4: OK205.4 T205.3 | length 5.9
  Top Layer w1.524: T205.3 92.593,35.056 93.599,34.05 OK205.4
NetOK205_6: OK205.6 R212.1 | length 3.1
  Top Layer w1.524: R212.1 OK205.6
NetOK206_1: OK206.1 R206.2 | length 3
  Top Layer w1.524: R206.2 OK206.1
NetOK206_4: OK206.4 T206.3 | length 14.5
  Top Layer w1.524: T206.3 65.486,28.745 66.379,27.853 OK206.4
NetOK206_6: OK206.6 R213.1 | length 2.9
  Top Layer w1.524: R213.1 OK206.6
NetOK207_1: OK207.1 R215.2 | length 2.9
  Top Layer w0.8: R215.2 OK207.1
NetOK207_4: OK207.4 T207.3 | length 7.1
  Top Layer w1.524: T207.3 16.861,52.079 OK207.4
NetOK207_6: OK207.6 R217.1 | length 3.8
  Top Layer w1.524: R217.1 11.698,50.238 OK207.6
NetOK208_1: OK208.1 R216.2 | length 3
  Top Layer w0.8: R216.2 23.634,41.221 OK208.1
NetOK208_4: OK208.4 T208.3 | length 7
  Top Layer w1.524: T208.3 28.714,52.037 OK208.4
NetOK208_6: OK208.6 R218.1 | length 3.8
  Top Layer w1.524: R218.1 OK208.6
NetQ200_1: Q200.1 R219.2 | length 2.7
  Top Layer w1.98: Q200.1 R219.2
NetQ300_1: Q300.1 R301.2 | length 2.8
  Top Layer w0.8: R301.2 81.026,-1.46 81.255,-1.232 Q300.1
PD_POS: CON101.3 R301.1 | length 22.7
  Top Layer w0.8: CON101.3 61.468,4.318 67.437,-1.651 R301.1
PD_SENS: Q300.5 R302.1 U100.22 | length 69.8
  Top Layer w0.8: v1(65.532,3.302) 65.659,3.302 65.913,3.556 Q300.5 71.755,3.686 72.115,4.046 73.07,4.046 78.486,9.461 R302.1
  Bottom Layer w0.8: U100.22@13.728,4.01 16.739,1 63.103,1 65.405,3.302 v1(65.532,3.302)
VCC: CON101.1 CON101.4 U100.4 | length 72.1
  Top Layer w1.524: U100.4@6.108,29.551 21.435,14.224 v1(31.242,14.224) ; v1(38.608,9.525) 49.022,9.525 51.308,7.239 CON101.1 51.662,6.985 54.278,9.601 63.932,9.601 CON101.4
  Bottom Layer w1.524: v1(31.242,14.224) 33.909,14.224 v1(38.608,9.525)
VCC3V3: PR300.2 R220.2 R302.2 U100.1 | length 96.8
  Top Layer w0.8: U100.1@6.108,4.01 14.906,12.808 74.723,12.808 76.474,14.559 76.474,14.689 78.295,16.51 R220.2 78.529,16.467 86.485,16.467 86.823,16.129 PR300.2 ; R302.2 82.677,9.652 v1(84.709,11.684)
  Bottom Layer w0.8: v1(84.709,11.684) 87.019,13.994 PR300.2
VD1: CON200.3 T200.2 | length 18.5
  Top Layer w1.98: T200.2 34.502,56.143 34.502,58.886 36.473,60.857 43.585,60.857 45.586,62.858 45.586,65.205 CON200.3
VD2: CON201.3 T203.2 | length 9.8
  Top Layer w1.98: T203.2 69.661,63.769 69.853,63.961 69.853,64.961 CON201.3@70.243,65.351
VDPED: CON202.3 T207.2 | length 17.7
  Top Layer w1.98: T207.2 10.88,56.143 10.88,58.505 13.232,60.857 19.582,60.857 21.221,62.496 CON202.3
VM1: CON200.1 T202.2 | length 10.3
  Top Layer w1.98: CON200.1 55.892,65.24 57.85,63.282 T202.2
VM2: CON201.1 T205.2 | length 38.6
  Top Layer w1.98: CON201.1@80.403,65.351 80.687,65.068 82.76,65.068 93.98,53.848 93.98,39.725 90.359,36.104 90.359,35.495 T205.2
VMPED: CON202.2 T208.2 | length 11.2
  Top Layer w1.98: T208.2 22.375,58.443 26.301,62.369 CON202.2
Z_CROSS: Q200.5 R220.1 U100.9 | length 44.3
  Top Layer w0.8: U100.9@41.668,29.551 53.058,18.161 69.466,18.161 72.26,15.367 Q200.5
  Top Layer w1.524: Q200.5 72.516,15.367 72.518,15.369 72.518,15.819 75.241,18.542 R220.1
pads on no net: CON202.4 OK200.3 OK200.5 OK201.3 OK201.5 OK202.3 OK202.5 OK203.3 OK203.5 OK204.3 OK204.5 OK205.3 OK205.5 OK206.3 OK206.5 OK207.3 OK207.5 OK208.3 OK208.5 Q200.3 Q200.6 Q300.3 Q300.6 U100.14 U100.18 U100.20 U100.24 U100.25 U100.27 U100.34 U100.35 U100.36 U100.38 U100.39 U100.40 U100.41 U100.42

## Polygon pours and split planes (outlines as drawn)
GND on Top Layer "GND_L01_P000" (solid, pour order 0): 0.508,46.228 0.635,46.355 89.535,46.355 89.535,39.624 83.312,39.624 82.296,38.608 77.47,33.782 46.863,33.782 46.863,30.226 46.355,29.718 46.99,29.083 46.99,19.558 79.375,19.558 85.217,25.4 95.504,25.4 95.504,-2.921 0.635,-2.921 0.381,-2.667 0.381,46.228
GND on Bottom Layer "GND_L02_P001" (solid, pour order 1): 89.535,46.355 89.535,39.624 83.312,39.624 83.312,39.497 77.597,33.782 47.117,33.782 46.99,24.638 44.958,24.638 0.254,24.638 0.254,46.228 0.381,46.355

## Other copper
Multi-Layer:
  lines w0.254: -4.052,-3.864 -3.925,-3.991

## Silkscreen, mask and mechanical layers (free items; w line width, h text height)
Top Overlay:
  text "'.EMPRESA'" at -3.8,42.8 h1.5
  text "'.PRODUTO'                                                                                 '.RESPONSAVEL'                                                                           '.Print_Date'" at -3.6,34.5 h1.2
  text "PD_POS" at 60.454,10.308 h1.52
  text "VCC" at 49.654,10.154 h1.52
Mechanical 1:
  lines w0.254: -3.988,-3.927 -3.988,36.073 -3.988,76.073 96.012,76.073 96.012,56.073 96.012,16.073 96.012,-3.927 71.012,-3.927 21.012,-3.927 -3.988,-3.927